# Altium PCB PCB1.PcbDoc
Units mm, origin at the board's own origin, x right, y up, seen from the top; angles counter-clockwise.
Board outline 222.63 x 70.99 mm, 2 copper layers (Top Layer, Bottom Layer); 43 components, 62 nets, 220 pads, 0 vias.
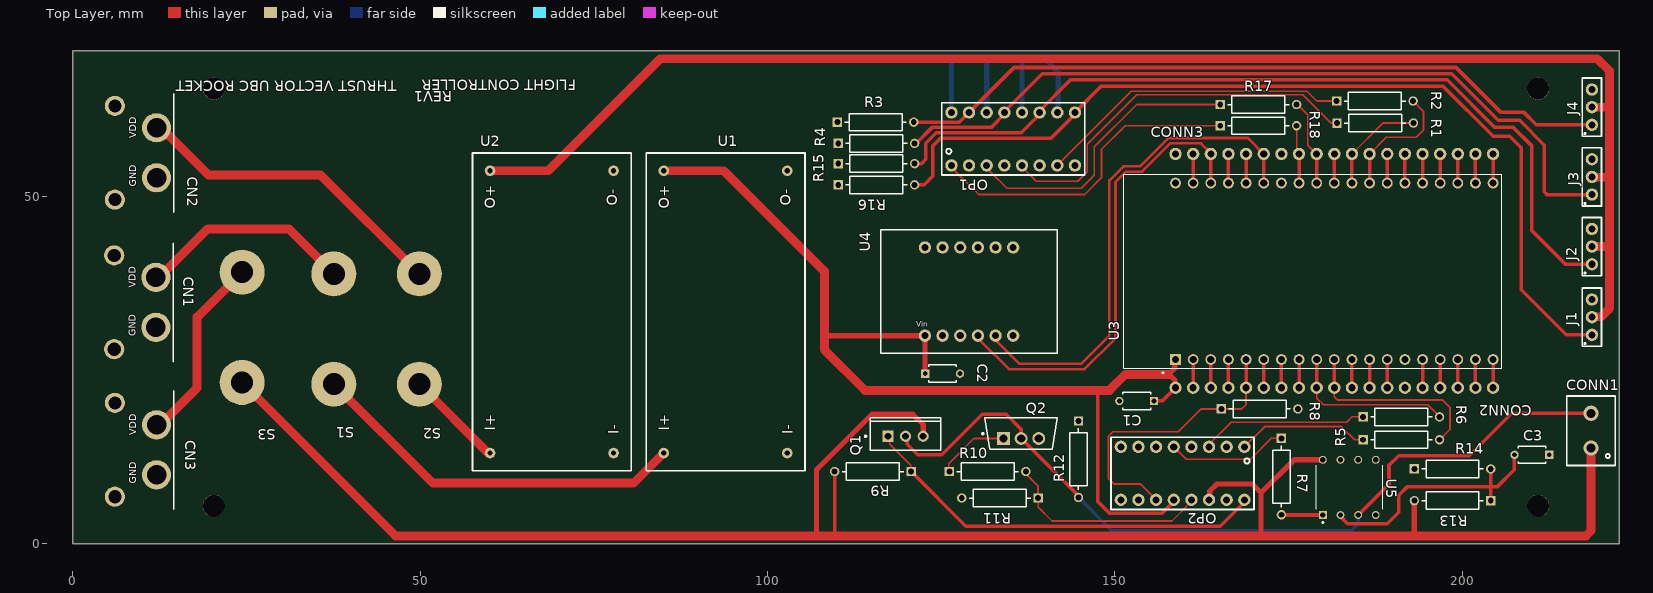
[diagram p0: Top Layer view]
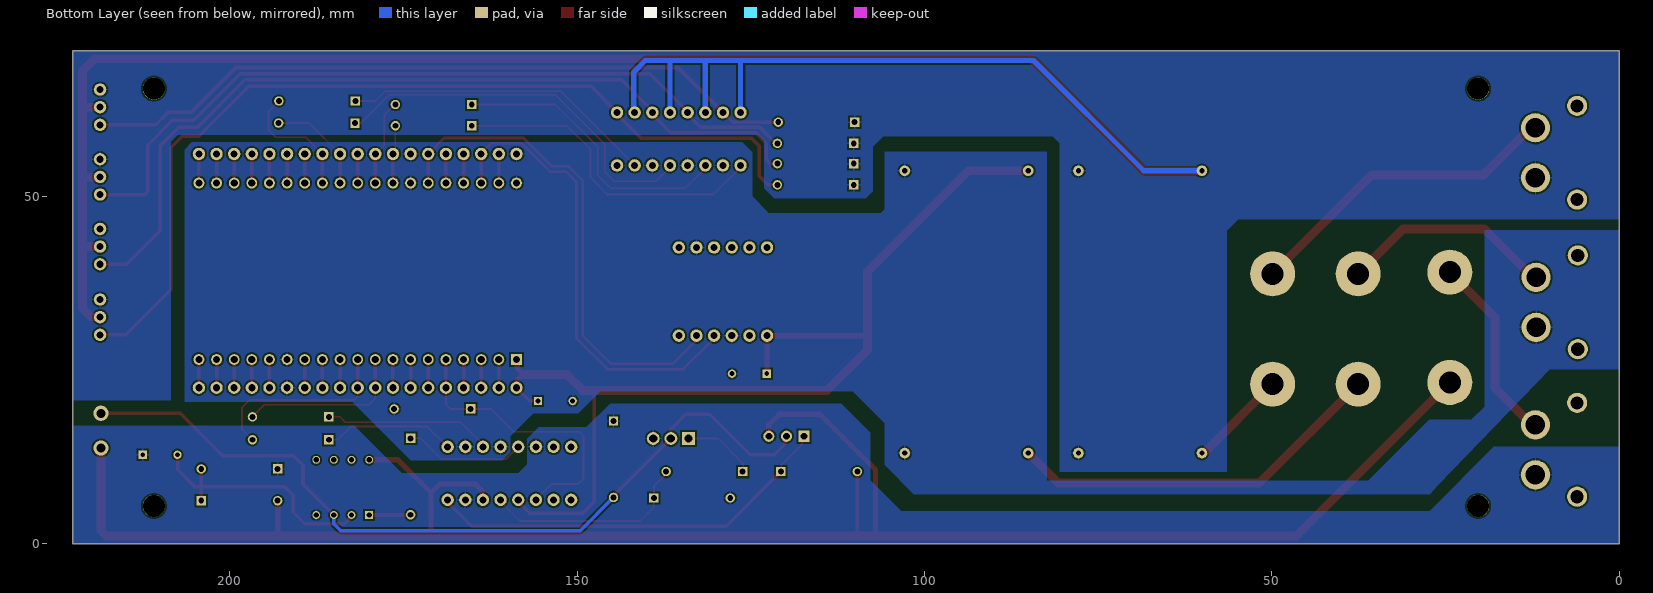
[diagram p1: Bottom Layer view, seen from below]
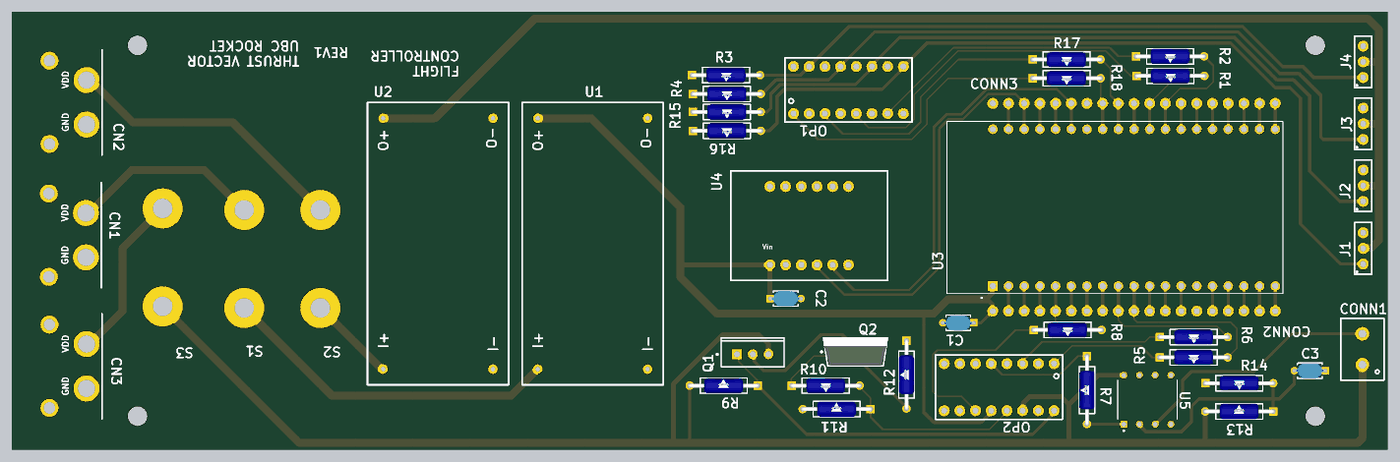
[diagram p2: 3D render of the assembled board from above, using the file's embedded part models]

## Layer stack, top to bottom
Top Solder: solder mask 0.0102, Solder Resist, Dk 3.5
Top Layer: signal copper 0.0356
Dielectric 1: dielectric 0.32, FR-4, Dk 4.8
Bottom Layer: signal copper 0.0356
Bottom Solder: solder mask 0.0102, Solder Resist, Dk 3.5

## Board outline
0,0 222.631,0 222.631,70.993 0,70.993

## Design rules (kind name [scope] priority, off if disabled: settings)
Clearance [All] p1: gap=0.254 ignorepadtopadclearanceinfootprint=FALSE except(0: Arc-Hole Track-Hole SMDPad-Hole THPad-Hole Via-Hole Fill-Hole Poly-Hole Region-Hole Text-Hole)
HoleSize [All] p1: absolutevalues=TRUE maxlimit=3.81 minlimit=0.025 maxpercent=80.000 minpercent=20.000
PolygonConnect [All] p1: connectstyle=Relief reliefconductorwidth=0.254 reliefentries=4 polygonreliefangle="90 Angle" airgapwidth=0.254
RoutingVias [All] p1: holewidth=0.711 width=1.27 viastyle="Through Hole" minholewidth=0.711 minwidth=1.27 maxholewidth=0.711 maxwidth=1.27
SolderMaskExpansion [All] p1: expansion=0.102 istentingtop=FALSE
Width [All] p1: maxlimit=1.524 minlimit=0.254 preferedwidth=0.254 minimp=50.000000 maximp=50.000000 favimp=50.000000
29 further rules are at their usual default settings.

## Components (designator, comment, footprint, x,y, rotation, side; value= is the part's Value field where it differs from the comment)
C1 "100nF" FP-RDE0M1-MFG 153.162,20.574 r180 top
C2 "100nF" FP-RDE0M1-MFG 125.222,24.511 r0 top
C3 "100nF" FP-RDE0M1-MFG 210.058,12.827 r180 top
CN1 "XT60-90degCONN" XT60-90CONN 13.819,27.029 r90 top
CN2 "XT60-90degCONN" XT60-90CONN 13.915,48.555 r90 top
CN3 "XT60-90degCONN" XT60-90CONN 13.915,5.795 r90 top
CONN1 "2PIN_TERMINAL" 2PIN_TERMINAL 218.567,13.796 r90 top
CONN2 "19POS_HEAD" 19POS_HEAD 158.75,22.479 r0 top
CONN3 "19POS_HEAD" 19POS_HEAD 158.75,56.134 r0 top
J1 "Servo_Header" SERVOHEADER 218.694,30.099 r90 top
J2 "Servo_Header" SERVOHEADER 218.694,40.259 r90 top
J3 "Servo_Header" SERVOHEADER 218.694,50.292 r90 top
J4 "Servo_Header" SERVOHEADER 218.694,60.325 r90 top
OP1 "ACPL847" 8PIN_DIP 126.492,62.103 r0 top
OP2 "ACPL847" 8PIN_DIP 168.656,6.35 r180 top
Q1 "FQP27P06" FAIR-TO-220-3 119.888,15.494 r90 top
Q2 "IRLZ44NPbF" FP-PG-TO220-3-MFG 136.525,15.875 r90 top
R1 "100" FP-RLR07-MFG 187.491,60.579 r0 top
R2 "100" FP-RLR07-MFG 187.452,63.754 r0 top
R3 "10k" FP-RLR07-MFG 115.57,60.706 r0 top
R4 "10k" FP-RLR07-MFG 115.697,57.658 r0 top
R5 "100" FP-RLR07-MFG 191.262,14.986 r0 top
R6 "100" FP-RLR07-MFG 191.262,18.288 r0 top
R7 "100" FP-RLR07-MFG 173.99,9.691 r270 top
R8 "10k" FP-RLR07-MFG 170.854,19.431 r0 top
R9 "10k" FP-RLR07-MFG 115.189,10.414 r180 top
R10 "100" FP-RLR07-MFG 131.699,10.414 r0 top
R11 "10k" FP-RLR07-MFG 133.477,6.604 r180 top
R12 "100k" FP-RLR07-MFG 144.78,12.192 r270 top
R13 "10k" FP-RLR07-MFG 198.628,6.223 r180 top
R14 "10k" FP-RLR07-MFG 198.628,10.795 r0 top
R15 "10k" FP-RLR07-MFG 115.697,54.737 r0 top
R16 "10k" FP-RLR07-MFG 115.697,51.689 r0 top
R17 "100" FP-RLR07-MFG 170.688,63.246 r0 top
R18 "100" FP-RLR07-MFG 170.688,60.198 r0 top
S1 "6-32 Screw Switch" "6-32 SCREW SWITCH" 37.592,22.987 r90 top
S2 "6-32 Screw Switch" "6-32 SCREW SWITCH" 49.911,22.987 r90 top
S3 "6-32 Screw Switch" "6-32 SCREW SWITCH" 24.384,23.241 r90 top
U1 "LM2596_Buck" "LM2596 BUCK" 85.09,13.081 r90 top
U2 "LM2596_Buck" "LM2596 BUCK" 60.071,13.081 r90 top
U3 "ESP32-DEVKITC-32UE" ESPRESSIF_ESP32-DEVKITC-32UE 181.61,39.243 r90 top
U4 "Adafruit_ICM_20948_IMU" ADAFRUIT_ICM_20948_IMU 122.682,29.972 r0 top
U5 "LM393P" DIP794W45P254L959H508Q8 183.769,8.128 r90 top

## Footprints (in the part's own frame and the unit in brackets; to place one, negate y for a bottom-side part, rotate by r counter-clockwise, add the part's x,y. Pads: shape width x height; smd on the part's side, far side on the other; paste and mask are expansions set on the pad)
2PIN_TERMINAL [mm]
  round 2.2 hole 1.3: 1(0,0) 2(5,0)
  silkscreen extent -2.5,-3.5 7.5,3.5
"6-32 SCREW SWITCH" [mil]
  round 255 hole 125: 1(0,0) 2(625,0)
8PIN_DIP [mil] "3/8 spacing"
  round 70 hole 40: 1(0,-300) 2(100,-300) 3(200,-300) 4(300,-300) 5(400,-300) 6(500,-300) 7(600,-300) 8(700,-300) 9(700,0) 10(600,0) 11(500,0) 12(400,0) 13(300,0) 14(200,0) 15(100,0) 16(0,0)
  silkscreen extent -55,-355 755,55
19POS_HEAD [mil]
  round 70 hole 40: 1(0,0) 2(100,0) 3(200,0) 4(300,0) 5(400,0) 6(500,0) 7(600,0) 8(700,0) 9(800,0) 10(900,0) 11(1000,0) 12(1100,0) 13(1200,0) 14(1300,0) 15(1400,0) 16(1500,0) 17(1600,0) 18(1700,0) 19(1800,0)
ADAFRUIT_ICM_20948_IMU [mil]
  round 70 hole 40: 1(0,0) 2(100,0) 3(200,0) 4(300,0) 5(400,0) 6(500,0) 7(0,500) 8(100,500) 9(200,500) 10(300,500) 11(400,500) 12(500,500)
  silkscreen extent -250,-100 750,600
DIP794W45P254L959H508Q8 [mm]
  rect 1.13x1.13 hole 0.78: 1(-3.97,3.81)
  round 1.13 hole 0.78: 2(-3.97,1.27) 3(-3.97,-1.27) 4(-3.97,-3.81) 5(3.97,-3.81) 6(3.97,-1.27) 7(3.97,1.27) 8(3.97,3.81)
  silkscreen extent -5.13,-4.8 3.18,4.8
ESPRESSIF_ESP32-DEVKITC-32UE [mm]
  rect 1.56x1.56 hole 1.04: 1(-12.7,22.86)
  round 1.56 hole 1.04: 2(-12.7,20.32) 3(-12.7,17.78) 4(-12.7,15.24) 5(-12.7,12.7) 6(-12.7,10.16) 7(-12.7,7.62) 8(-12.7,5.08) 9(-12.7,2.54) 10(-12.7,0) 11(-12.7,-2.54) 12(-12.7,-5.08) 13(-12.7,-7.62) 14(-12.7,-10.16) 15(-12.7,-12.7) 16(-12.7,-15.24) 17(-12.7,-17.78) 18(-12.7,-20.32) 19(-12.7,-22.86) 20(12.7,22.86) 21(12.7,20.32) 22(12.7,17.78) 23(12.7,15.24) 24(12.7,12.7) 25(12.7,10.16) 26(12.7,7.62) 27(12.7,5.08) 28(12.7,2.54) 29(12.7,0) 30(12.7,-2.54) 31(12.7,-5.08) 32(12.7,-7.62) 33(12.7,-10.16) 34(12.7,-12.7) 35(12.7,-15.24) 36(12.7,-17.78) 37(12.7,-20.32) 38(12.7,-22.86)
  silkscreen extent -14.71,-24.1 13.95,30.3
FAIR-TO-220-3 [mm] "FM, 3-Leads, Body 10.2x4.7mm, Pitch 2.54mm"
  rect 1.6x1.6 hole 1: 1(0,2.54)
  round 1.6 hole 1: 2(0,0) 3(0,-2.54)
  silkscreen extent -2.04,-5.1 2.66,5.87, body extent -2.04,-5.1 2.66,5.1, height 18.95
FP-PG-TO220-3-MFG [mm]
  rect 1.85x1.85 hole 1.2 paste-1000 mask+0: 1(-0.705,2.54)
  round 1.85 hole 1.2 paste-1000 mask+0: 2(-0.705,0) 3(-0.705,-2.54)
  silkscreen extent -2.27,-5.2 2.27,5.62, body extent -2.37,-5.55 2.37,5.55, height 0.25
FP-RDE0M1-MFG [mm]
  rect 1.2x1.2 hole 0.7 paste-1000 mask+0: 1(-2.5,0)
  round 1.2 hole 0.7 paste-1000 mask+0: 2(2.5,0)
  silkscreen extent -2,-1.25 2,1.25, body extent -3.2,-1.35 3.2,1.35, height 0.25
FP-RLR07-MFG [mm]
  rect 1.35x1.35 hole 0.85 paste-1000 mask+0: 1(-5.5,0)
  round 1.35 hole 0.85 paste-1000 mask+0: 2(5.5,0)
  silkscreen extent -4.42,-1.25 4.42,1.25, body extent -6.27,-1.35 6.27,1.35, height 0.25
"LM2596 BUCK" [mil]
  round 60 hole 30: 1(0,0) 2(0,-700) 3(1600,0) 4(1600,-700)
  silkscreen extent -100,-800 1700,100
SERVOHEADER [mil]
  round 70 hole 40: 1(0,0) 2(100,0) 3(200,0)
  silkscreen extent -65,-55 265,55
XT60-90CONN [mm]
  round 4.2 hole 2.8: 1(11.35,1.85) 2(4.15,1.85)
  round 2.9 hole 1.9: 3(1,7.85) 4(14.5,7.85)
  silkscreen extent -0.76,-0.64 16.26,-0.63

## Part data
C1 C2 C3: library part CMP-06035-051680-1, "Ceramic Capacitor 100nF ±10% 50V X7R Radial", Case/Package=Radial, Dielectric=X7R, Max Operating Temperature=125°C, Min Operating Temperature=-55°C, Package Quantity=2000, Resistor Type=Ceramic, Tolerance=10%, Voltage Rating=50V, Capacitance=100nF, Height=3.5mm, Height - Seated (Max)=0.236inch, Lead Diameter=0.5mm, Lead Free="Lead Free", Lead Pitch=0.197inch, Lead/Base Style=Kinked, Length=0.157inch, Mount="Through Hole", Packaging="Tape and Reel", Termination=Radial, Voltage Rating (DC)=50V, Width=3.5mm
Q1: library part CMP-2000-04936-1, "P-Channel QFET(R) MOSFET, -60 V, -27 A, -55 to 175 degC, 3-Pin TO-220, RoHS, Tube", Drain-Source On Resistance-Max=0.07O, Drain-to-Source Voltage [Vdss]=60V, Manufacturer=Fairchild, Package Description="3-Pin Through Hole Device, Body 10 x 4.5 mm, Pitch 2.54 mm", Package Reference=TO-220, Rated Power Dissipation=120W, Channel Type=P-Channel, Datasheet URL=https://www.fairchildsemi.com/datasheets/FQ/FQP27P06.pdf, Datasheet Version=Mar-13, Manufacturer URL=https://www.fairchildsemi.com/, Package URL=https://www.fairchildsemi.com/package-drawings/TO/TO220B03.pdf, Qg Gate Charge=33nC
Q2: library part CMP-32901-000488-1, "MOSFET N-CH 55V 47A TO220AB", Case/Package=TO-220, Continuous Drain Current (ID)=47A, Drain to Source Breakdown Voltage=55V, Drain to Source Resistance=35mR, Gate to Source Voltage (Vgs)=16V, Input Capacitance=1.7nF, Max Operating Temperature=175°C, Max Power Dissipation=110W, Min Operating Temperature=-55°C, Threshold Voltage=2V, Drain to Source Voltage (Vdss)=55V, Element Configuration=Single, Halogen Free="Halogen Free", Height=0.6inch, Lead Free="Lead Free", Length=0.414inch, Max Dual Supply Voltage=55V, Mount="Through Hole", Number of Pins=3, Packaging=Rail/Tube, Power Dissipation=110W, Rds On Max=22mR, REACH SVHC="No SVHC", RoHS Compliant=Yes, Turn-Off Delay Time=26ns, Turn-On Delay Time=11ns, Width=0.185inch
R1 R2 R3 R4 R5 R6 R7 R8 R9 R10 R11 R12 R13 R14 R15 R16 R17 R18: library part CMP-00030-39447724-1, "RLR07C1001FSB14 Fixed Resistor, Metal Film, 0.25W, 1000ohm, 250V, 1% +/-Tol, 100ppm/Cel, Through Hole Mount", Case/Package=Conformal, Max Operating Temperature=150°C, Max Power Dissipation=250mW, Min Operating Temperature=-65°C, Resistance=1kΩ, Temperature Coefficient=100ppm/°C, Tolerance=1%, Voltage Rating=250V, Composition="Metal Film", Contact Plating="Lead, Tin", Diameter=2.29mm, Failure Rate=0.001%, Features="Military, Moisture Resistant, Weldable", Lead Diameter=640µm, Lead Free="Contains Lead", Lead Length=38.1mm, Length=7.62mm, Military Standard=MIL-PRF-39017, NexarPartId=39447724, Number of Pins=14, Number of Terminations=2, Packaging=Bulk, Power Rating=250mW, Radiation Hardening=No, REACH SVHC=Unknown, RoHS=Non-Compliant, Schedule B="8533210090, 8533210090", Termination=Axial, Voltage Rating (DC)=250V, Width=2.29mm, Wire/Cable Diameter=50.8µm
U1 U2: "buck converter breakout"
U3: "ESP32-WROOM-32UE series Transceiver; 802.11 b/g/n (Wi-Fi, WiFi, WLAN), BluetoothÂ® Smart Ready 4.x Dual Mode Evaluation Board", Package=None, Availability="In Stock", Check_prices=https://www.snapeda.com/parts/ESP32-DEVKITC-32UE/Espressif+Systems/view-part/?ref=eda, MF="Espressif Systems", MP=ESP32-DEVKITC-32UE, Price=None, Purchase-URL=https://pricing.snapeda.com/search/part/ESP32-DEVKITC-32UE/?ref=eda, SnapEDA_Link=https://www.snapeda.com/parts/ESP32-DEVKITC-32UE/Espressif+Systems/view-part/?ref=snap
U5: "Dual differential comparator, commercial grade 8-PDIP 0 to 70", Package="PDIP-8 Texas Instruments", Availability=Unavailable, BuyPart=https://www.snapeda.com/parts/LM393P/Texas%20Instruments/view-part/46802/?ref=eda, MF="Texas Instruments", MP=LM393P, Price=None, SnapEDA_Link=https://www.snapeda.com/parts/LM393P/Texas%20Instruments/view-part/46802/?ref=snap, Texas_Instruments-Purchase-URL=https://snapeda.com/shop?store=Texas+Instruments&id=46802

## Free pads (board coordinates)
  round 3.175 hole 3.175 unplated: 1(20.32,5.461) 2(20.32,65.532) 3(210.947,5.461) 4(210.947,65.532)

## Nets (pads, with @x,y where several pads share a name; then routed paths per layer and width w, separated by ;. In a path a pad name is that pad's centre, name@x,y a point inside that pad or via, vN(x,y) a via of type N, cw(c..) or ccw(c..) an arc to the next point about the centre after c; other vN are vias at no path point)
3.3V: C1.1 C2.1 CONN2.1 OP2.12 U1.3 U3.1 U4.1 | length 151.1
  Top Layer w0.508: 147.574,22.098 147.574,6.096 149.225,4.445 156.845,4.445 158.496,6.096 OP2.12 ; C1.1 156.845,20.574 CONN2.1 CONN2.1@158.688,22.541 ; 157.988,24.257 157.988,24.638 ; U3.1@158.649,26.442 U3.1
  Top Layer w0.762: U1.3 85.236,53.575 U1.3@85.744,53.575 ; 108.204,29.972 U4.1 C2.1@122.682,24.511 ; 157.988,24.257 158.688,23.557 CONN2.1@158.688,22.541 ; 157.988,24.638 158.649,25.299 U3.1@158.649,26.442
  Top Layer w1.27: U1.3 85.744,53.721 93.726,53.721 108.204,39.243 108.204,29.972 108.204,27.94 114.046,22.098 147.574,22.098 149.225,22.098 151.511,24.384 157.734,24.384
5V: J1.2 J2.2 J3.2 J4.2 OP1.10 OP1.12 OP1.14 OP1.16 U2.3 | length 330.8
  Top Layer w1.27: U2.3 68.453,53.721 84.582,69.85 219.456,69.85 221.234,68.072 221.234,62.865 ; J1.2 218.765,32.71 220.035,32.71 221.234,33.909 221.234,42.799 ; J2.2 221.234,42.799 ; J4.2 221.234,62.865 ; J3.2@218.744,52.782 221.234,52.782 ; 221.234,42.799 221.234,52.782 ; 221.234,52.782 221.234,62.865
  Bottom Layer w0.762: U2.3 68.453,53.721 84.328,69.596 126.492,69.596 ; OP1.16 126.492,69.596 ; OP1.14 131.572,69.596 ; OP1.12 136.652,69.596 ; OP1.10 141.859,62.23 141.859,67.945 140.208,69.596 136.652,69.596 ; 126.492,69.596 131.572,69.596 ; 131.572,69.596 136.652,69.596
"7.4V (Lipo1)": S1.1 U1.1 | length 55.2
  Top Layer w0.508: S1.1@37.592,22.924 S1.1
  Top Layer w1.27: S1.1 51.816,8.763 80.772,8.763 U1.1
"7.4V Lipo2": S2.1 U2.1 | length 14.3
  Top Layer w1.27: S2.1 59.768,13.13 60.022,13.13 U2.1
"7.4V Lipo3": CONN1.1 OP2.14 Q1.3 R9.2 R13.2 S3.1 U5.8 | length 287.2
  Top Layer w0.508: 109.689,1.182 R9.2
  Top Layer w0.762: 106.934,1.143 107.061,1.27 107.061,10.668 115.062,18.669 120.904,18.669 122.428,17.145 Q1.3 ; 109.689,1.182 109.728,1.143 ; OP2.14 163.679,6.453 163.679,7.596 164.719,8.636 169.799,8.636 171.069,7.366 ; 171.069,1.143 171.069,7.366 ; U5.8 175.801,12.098 171.069,7.366 ; 193.128,1.143 R13.2
  Top Layer w1.27: S3.1 46.482,1.143 106.934,1.143 109.728,1.143 171.069,1.143 193.128,1.143 217.823,1.143 218.567,1.887 CONN1.1
"GND (Lipo1)": C1.2 C2.2 CN1.2 CONN2.14 CONN3.1 CONN3.7 OP1.2 OP1.4 OP1.6 OP1.8 OP2.2 OP2.4 R8.2 U1.2 U1.4 U3.14 U3.20 U3.26 U4.3 U4.11
"GND (Lipo2)": CN2.2 J1.3 J2.3 J3.3 J4.3 R3.1 R4.1 R15.1 R16.1 U2.2 U2.4
"GND (Lipo3)": C3.1 CN3.2 OP2.6 OP2.15 Q2.3 R11.2 R12.1 R14.1 U5.4 | length 0
  Top Layer w0.254: R14.1@193.097,10.764 R14.1
NetC3_2: C3.2 R13.1 R14.2 U5.2 | length 37.1
  Top Layer w0.508: U5.2 182.499,3.937 183.515,2.921 189.23,2.921 190.881,4.572 190.881,6.985 192.151,8.255 204.089,8.255 ; R13.1 204.128,8.216 204.089,8.255 ; R14.2 204.128,8.294 204.089,8.255 ; C3.2 207.518,12.787 207.518,10.668 205.105,8.255 204.089,8.255
NetCN1_1: CN1.1 S1.2 | length 31.2
  Top Layer w1.27: CN1.1 12.471,38.379 19.431,45.339 31.115,45.339 S1.2
NetCN2_1: CN2.1 S2.2 | length 46.6
  Top Layer w1.27: CN2.1 12.739,59.905 19.558,53.086 35.687,53.086 S2.2
NetCN3_1: CN3.1 S3.2 | length 27.4
  Top Layer w1.27: CN3.1 12.573,17.145 17.907,22.479 17.907,32.639 S3.2
NetCONN1_2: CONN1.2 Q1.2 Q2.2 R12.2 U5.3 | length 119.9
  Top Layer w0.508: Q1.2 120.146,15.236 120.146,14.347 121.666,12.827 125.095,12.827 130.937,18.669 134.366,18.669 136.51,16.525 136.51,15.185 Q2.2 144.78,6.915 R12.2 ; U5.3 189.484,8.603 189.484,11.303 190.881,12.7 201.032,12.7 207.128,18.796 CONN1.2
  Bottom Layer w0.508: R12.2 149.567,1.905 184.023,1.905 185.039,2.921 U5.3
NetCONN2_2: CONN2.2 U3.2 | length 4.1
  Top Layer w0.508: CONN2.2 U3.2
NetCONN2_3: CONN2.3 U3.3 | length 4.1
  Top Layer w0.508: CONN2.3 U3.3
NetCONN2_4: CONN2.4 U3.4 | length 4.1
  Top Layer w0.508: CONN2.4 U3.4
NetCONN2_5: CONN2.5 OP2.11 R8.1 U3.5 | length 42.4
  Top Layer w0.254: OP2.11 153.67,8.636 149.86,8.636 149.098,9.398 149.098,15.494 149.733,16.129 159.131,16.129 162.433,19.431 R8.1 168.275,19.431 168.91,20.066 CONN2.5
  Top Layer w0.508: CONN2.5 U3.5
NetCONN2_6: CONN2.6 U3.6 | length 4.1
  Top Layer w0.508: CONN2.6 U3.6
NetCONN2_7: CONN2.7 U3.7 | length 4.1
  Top Layer w0.508: CONN2.7 U3.7
NetCONN2_8: CONN2.8 U3.8 | length 4.1
  Top Layer w0.508: CONN2.8 U3.8
NetCONN2_9: CONN2.9 R6.2 U3.9 | length 24.3
  Top Layer w0.254: CONN2.9 179.07,20.955 179.998,20.027 195.045,20.027 R6.2@196.723,18.349
  Top Layer w0.508: CONN2.9 U3.9
NetCONN2_10: CONN2.10 R5.2 U3.10 | length 27.9
  Top Layer w0.254: CONN2.10 181.61,21.209 182.118,20.701 197.231,20.701 198.247,19.685 198.247,16.471 R5.2
  Top Layer w0.508: CONN2.10 U3.10
NetCONN2_11: CONN2.11 U3.11 | length 4.1
  Top Layer w0.508: CONN2.11 U3.11
NetCONN2_12: CONN2.12 U3.12 | length 4.1
  Top Layer w0.508: CONN2.12 U3.12
NetCONN2_13: CONN2.13 U3.13 | length 4.1
  Top Layer w0.508: CONN2.13 U3.13
NetCONN2_15: CONN2.15 U3.15 | length 4.1
  Top Layer w0.508: CONN2.15 U3.15
NetCONN2_16: CONN2.16 U3.16 | length 4.1
  Top Layer w0.508: CONN2.16 U3.16
NetCONN2_17: CONN2.17 U3.17 | length 4.1
  Top Layer w0.508: CONN2.17 U3.17
NetCONN2_18: CONN2.18 U3.18 | length 4.1
  Top Layer w0.508: CONN2.18 U3.18
NetCONN2_19: CONN2.19 U3.19 | length 4.1
  Top Layer w0.508: CONN2.19 U3.19
NetCONN3_2: CONN3.2 U3.21 | length 4.2
  Top Layer w0.508: U3.21 CONN3.2
NetCONN3_3: CONN3.3 U3.22 U4.4 | length 67.3
  Top Layer w0.381: U4.4 130.302,29.594 130.763,29.133 130.763,29.13 134.747,25.146 145.669,25.146 150.114,29.591 150.114,52.07 151.638,53.594 153.924,53.594 157.988,57.658 162.433,57.658 163.83,56.261 CONN3.3
  Top Layer w0.508: U3.22 CONN3.3
NetCONN3_4: CONN3.4 U3.23 | length 4.2
  Top Layer w0.508: U3.23 CONN3.4
NetCONN3_5: CONN3.5 U3.24 | length 4.2
  Top Layer w0.508: U3.24 CONN3.5
NetCONN3_6: CONN3.6 U3.25 U4.5 | length 72.4
  Top Layer w0.381: U4.5 133.109,29.705 133.109,29.07 136.271,25.908 145.161,25.908 149.225,29.972 149.225,52.324 151.257,54.356 153.67,54.356 157.734,58.42 169.164,58.42 CONN3.6
  Top Layer w0.508: U3.25 CONN3.6
NetCONN3_8: CONN3.8 R18.2 U3.27 | length 8.4
  Top Layer w0.254: R18.2 176.188,56.82 176.53,56.478 CONN3.8
  Top Layer w0.508: U3.27 CONN3.8
NetCONN3_9: CONN3.9 R17.2 U3.28 | length 12.8
  Top Layer w0.254: R17.2@176.061,63.5 177.8,61.761 177.8,57.404 CONN3.9
  Top Layer w0.508: U3.28 CONN3.9
NetCONN3_10: CONN3.10 U3.29 | length 4.2
  Top Layer w0.508: U3.29 CONN3.10
NetCONN3_11: CONN3.11 R1.2 U3.30 | length 14.9
  Top Layer w0.254: CONN3.11 188.595,60.579 R1.2
  Top Layer w0.508: U3.30 CONN3.11
NetCONN3_12: CONN3.12 R2.2 U3.31 | length 18.2
  Top Layer w0.254: CONN3.12 189.103,58.547 193.421,58.547 194.437,59.563 194.437,62.269 R2.2
  Top Layer w0.508: U3.31 CONN3.12
NetCONN3_13: CONN3.13 U3.32 | length 4.2
  Top Layer w0.508: U3.32 CONN3.13
NetCONN3_14: CONN3.14 U3.33 | length 4.2
  Top Layer w0.508: U3.33 CONN3.14
NetCONN3_15: CONN3.15 U3.34 | length 4.2
  Top Layer w0.508: U3.34 CONN3.15
NetCONN3_16: CONN3.16 U3.35 | length 4.2
  Top Layer w0.508: U3.35 CONN3.16
NetCONN3_17: CONN3.17 U3.36 | length 4.2
  Top Layer w0.508: U3.36 CONN3.17
NetCONN3_18: CONN3.18 U3.37 | length 4.2
  Top Layer w0.508: U3.37 CONN3.18
NetCONN3_19: CONN3.19 U3.38 | length 4.2
  Top Layer w0.508: U3.38 CONN3.19
NetJ1_1: J1.1 OP1.9 R16.2 | length 132.9
  Top Layer w0.508: R16.2 122.555,51.689 123.825,52.959 123.825,57.277 124.968,58.42 140.843,58.42 144.272,61.849 OP1.9 148.082,65.913 197.231,65.913 204.47,58.674 206.883,58.674 208.534,57.023 208.534,36.576 215.011,30.099 J1.1
NetJ2_1: J2.1 OP1.11 R15.2 | length 122.3
  Top Layer w0.508: R15.2 122.174,54.737 122.809,55.372 122.809,57.658 124.333,59.182 136.525,59.182 139.192,61.849 139.192,62.357 143.637,66.802 197.866,66.802 204.724,59.944 207.391,59.944 210.058,57.277 210.058,45.085 214.884,40.259 J2.1
NetJ3_1: J3.1 OP1.13 R4.2 | length 113
  Top Layer w0.508: R4.2 121.412,57.658 123.698,59.944 132.207,59.944 134.112,61.849 134.112,62.23 139.573,67.691 198.501,67.691 205.232,60.96 208.28,60.96 211.836,57.404 211.836,50.673 212.217,50.292 J3.1
NetJ4_1: J4.1 OP1.15 R3.2 | length 104.3
  Top Layer w0.508: R3.2 127.635,60.706 OP1.15 135.509,68.58 199.136,68.58 205.613,62.103 208.915,62.103 210.693,60.325 J4.1
NetOP1_1: OP1.1 R18.1 | length 47.1
  Top Layer w0.254: OP1.1 126.492,54.229 130.429,50.292 145.669,50.292 148.082,52.705 148.082,56.769 151.511,60.198 R18.1
NetOP1_3: OP1.3 R17.1 | length 42.6
  Top Layer w0.254: OP1.3 131.572,54.139 131.936,53.776 131.936,53.738 134.493,51.181 145.161,51.181 147.066,53.086 147.066,57.15 153.162,63.246 R17.1
NetOP1_5: OP1.5 R1.1 | length 55.6
  Top Layer w0.254: OP1.5 136.652,54.229 138.684,52.197 144.653,52.197 146.05,53.594 146.05,57.531 153.162,64.643 177.038,64.643 181.084,60.597 181.973,60.597 R1.1
NetOP1_7: OP1.7 R2.1 | length 45.2
  Top Layer w0.254: OP1.7 152.4,65.151 177.673,65.151 179.07,63.754 R2.1
NetOP2_1: OP2.1 R5.1 | length 19.3
  Top Layer w0.254: OP2.1 171.577,16.891 182.626,16.891 184.531,14.986 R5.1@185.939,14.986
NetOP2_3: OP2.3 R6.1 | length 24
  Top Layer w0.254: OP2.3 163.576,14.351 166.751,17.526 183.388,17.526 184.15,18.288 R6.1@185.603,18.288
NetOP2_5: OP2.5 R7.1 | length 17.5
  Top Layer w0.254: OP2.5 160.274,12.192 169.545,12.192 172.544,15.191 R7.1
NetOP2_13: OP2.13 R10.2 R11.1 | length 30.2
  Top Layer w0.254: R10.2 137.199,10.121 138.938,8.382 138.938,6.643 R11.1 138.977,5.295 140.97,3.302 158.242,3.302 161.036,6.096 OP2.13
NetOP2_16: OP2.16 Q1.1 R9.1 | length 59.5
  Top Layer w0.254: Q1.1 117.618,15.224 117.618,14.335 120.632,11.321 120.632,10.471 R9.1
  Top Layer w0.508: R9.1 128.563,2.54 165.19,2.54 168.656,6.006 OP2.16
NetQ2_1: Q2.1 R10.1 | length 10.5
  Top Layer w0.254: R10.1 126.111,10.502 126.111,11.557 129.724,15.17 Q2.1
NetR7_2: R7.2 U5.1 | length 6.2
  Top Layer w0.508: R7.2@173.99,4.158 U5.1 ; R7.2@173.99,4.533 R7.2@174.218,4.533
pads on no net: CN1.3 CN1.4 CN2.3 CN2.4 CN3.3 CN3.4 OP2.7 OP2.8 OP2.9 OP2.10 U4.2 U4.6 U4.7 U4.8 U4.9 U4.10 U4.12 U5.5 U5.6 U5.7

## Polygon pours and split planes (outlines as drawn)
"GND (Lipo2)" on Bottom Layer "GND_(LIPO2)_L02_P004" (solid, pour order 4): 107.442,50.8 108.458,49.784 121.666,49.784 123.063,51.181 123.063,58.039 123.952,58.928 163.449,58.928 207.518,58.928 208.534,57.912 208.534,20.701 222.631,20.701 222.631,70.993 0,70.993 0,46.736 54.864,46.736 56.388,45.212 56.515,45.212 56.515,10.414 80.518,10.414 80.518,57.658 81.534,58.674 105.918,58.674 107.442,57.15
"GND (Lipo1)" on Bottom Layer "GND_(LIPO1)_L02_P003" (solid, pour order 3): 205.486,57.785 206.502,56.769 206.502,20.459 182.321,20.41 174,12.065 160.782,12.065 159.639,13.208 159.639,15.494 156.337,18.796 149.86,18.796 146.685,21.971 110.363,21.971 105.727,17.335 105.727,11.367 101.536,7.175 31.432,7.175 27.268,7.175 26.14,8.424 10.003,25.117 0,25.146 0,45.148 19.367,45.148 19.367,19.748 21.273,17.843 27.368,17.843 36.131,9.08 82.423,9.08 82.423,56.451 105.727,56.451 105.727,48.197 106.299,47.625 122.428,47.625 124.841,50.038 124.841,56.388 126.238,57.785
"GND (Lipo3)" on Bottom Layer "GND_(LIPO3)_L02_P001" (solid, pour order 1): 148.717,16.764 145.288,20.193 112.014,20.193 107.823,16.002 107.823,9.144 103.378,4.699 27.305,4.699 18.034,13.97 0,13.97 0,0 222.631,0 222.631,17.018 182.118,17.018 175.26,10.16 158.496,10.16 157.226,11.43 157.226,15.113 155.575,16.764

## Silkscreen, mask and mechanical layers (free items; w line width, h text height)
Top Overlay:
  text "FLIGHT CONTROLLER" at 72.517,66.802 h1.52 r180
  text "THRUST VECTOR UBC ROCKET" at 46.609,66.675 h1.52 r180
  text "REV1" at 54.61,65.151 h1.52 r180

## Text inside footprints (layer, text, board x,y; h text height)
CN1: Top Overlay "VDD" at 9.047,36.881 h1 r90; Top Overlay "GND" at 9.047,29.896 h1 r90
CN2: Top Overlay "VDD" at 9.143,58.407 h1 r90; Top Overlay "GND" at 9.143,51.422 h1 r90
CN3: Top Overlay "VDD" at 9.143,15.647 h1 r90; Top Overlay "GND" at 9.143,8.662 h1 r90
U1: Top Overlay "I+" at 85.852,16.256 h1.52 r90; Top Overlay "I-" at 103.632,15.748 h1.52 r90; Top Overlay "O+" at 85.852,48.26 h1.52 r90; Top Overlay "O-" at 103.378,48.641 h1.52 r90
U2: Top Overlay "I+" at 60.833,16.256 h1.52 r90; Top Overlay "I-" at 78.613,15.748 h1.52 r90; Top Overlay "O+" at 60.833,48.26 h1.52 r90; Top Overlay "O-" at 78.359,48.641 h1.52 r90
U4: Top Overlay "Vin" at 121.412,31.242 h0.76